# Allegro board Cloudshield_600-0129-001_18Oct18_1015_TAM_review.brd
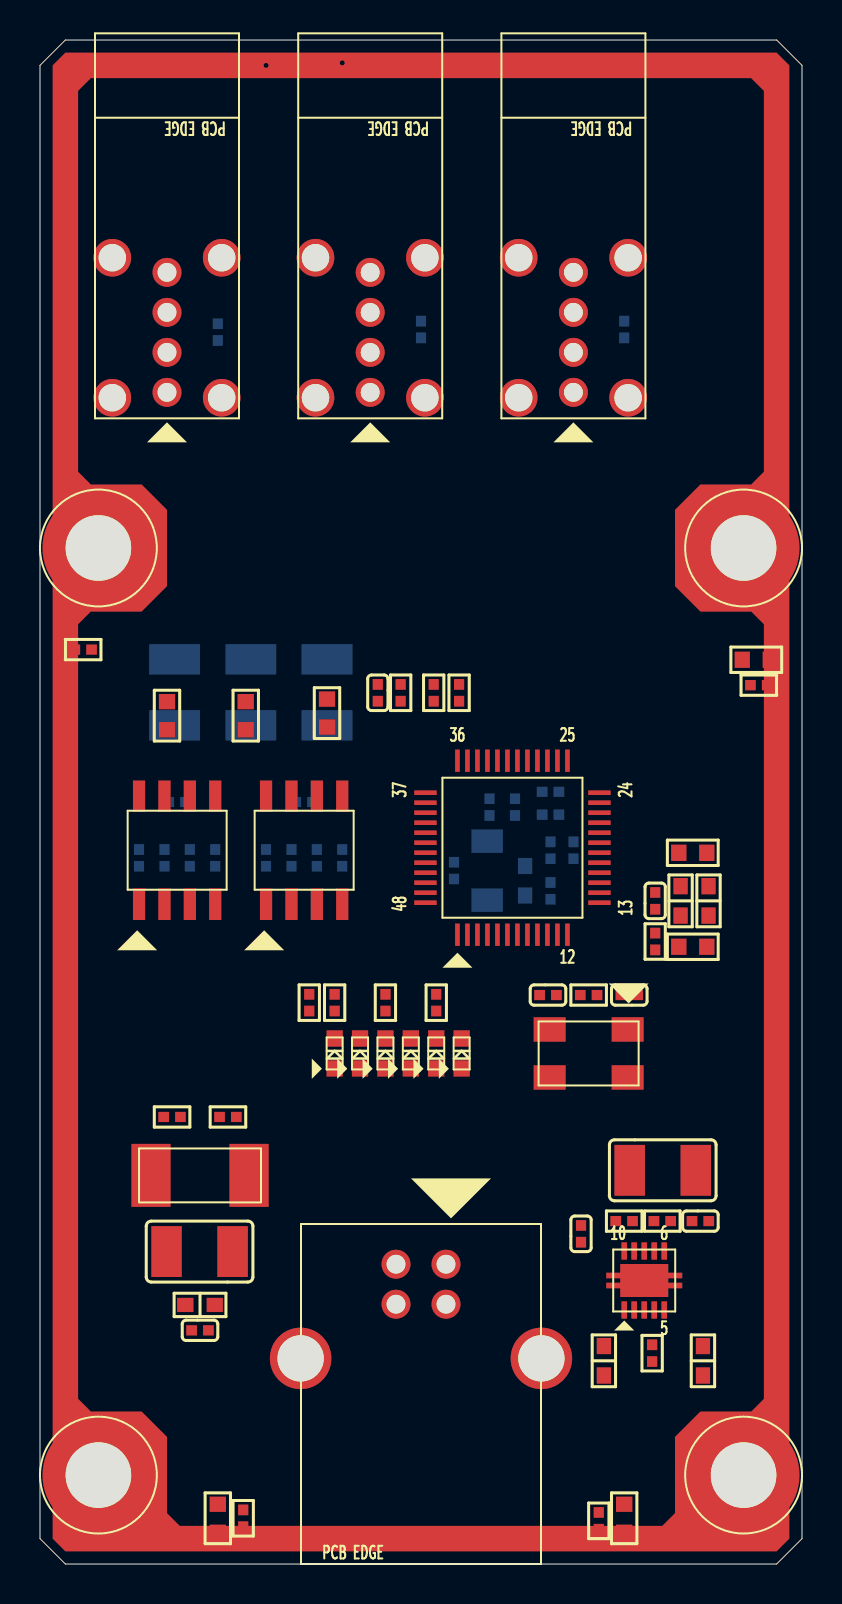
[diagram p0: board, top side]
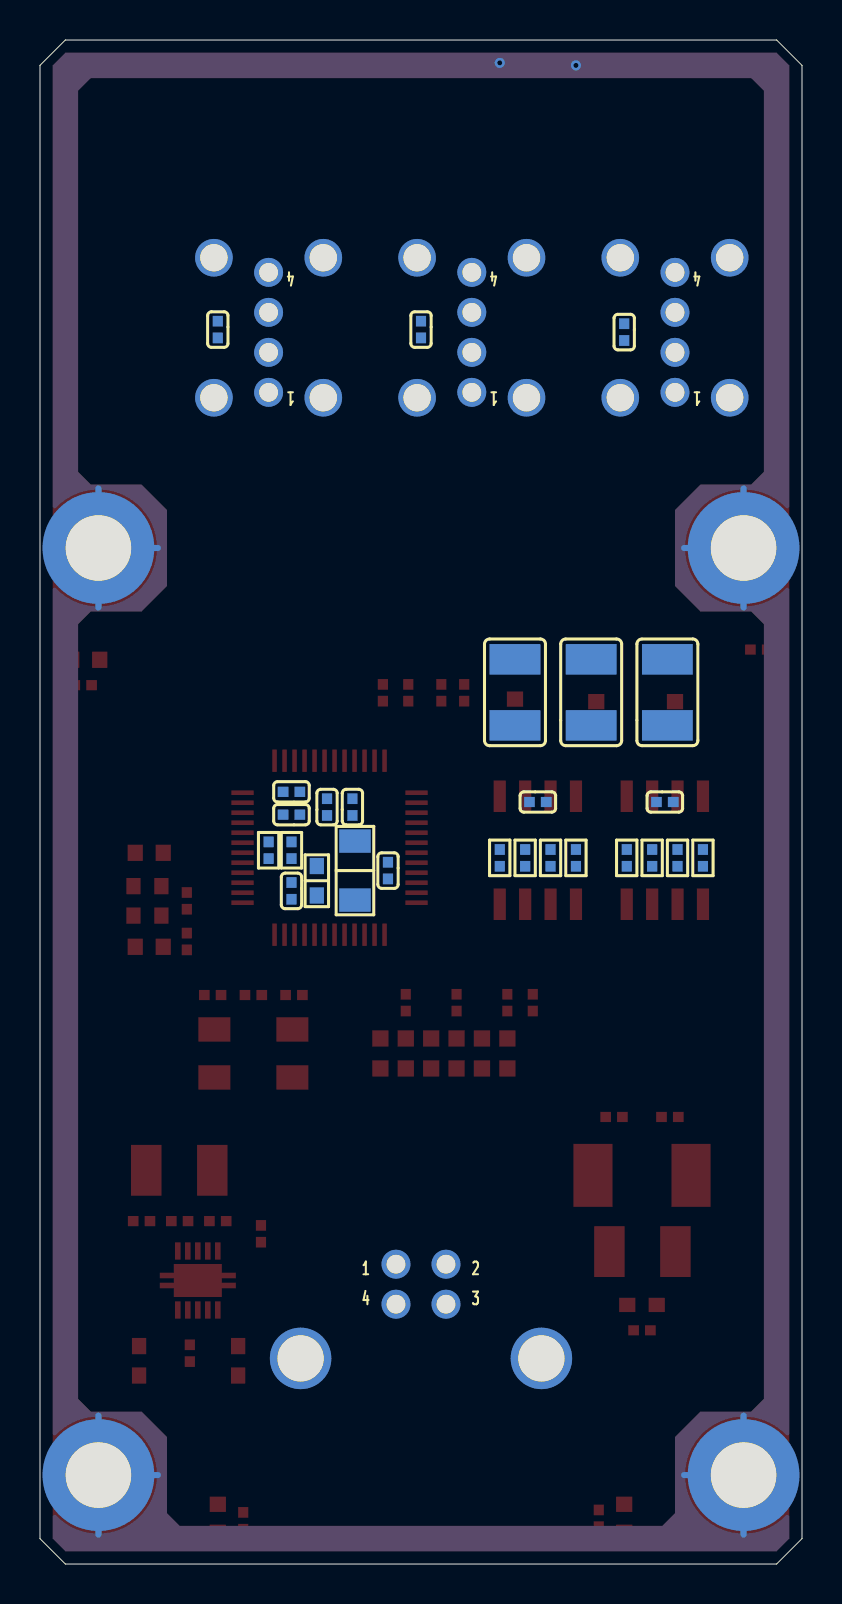
[diagram p1: board, bottom side, seen from below]

Outline 38.1 x 76.2 mm; copper layers: TOP, L2_GND, L3_PWR, BOTTOM. Coordinates in mm from the lower left corner of the outline.
Outline path: 0,74.93 0,1.27 1.27,0 36.83,0 38.1,1.27 38.1,74.93 36.83,76.2 1.27,76.2 0,74.93

## Design rules (mm)
net group USB_D1: nets USB_D1_N USB_D1_P
net group USB_D2: nets USB_D2_N USB_D2_P
net group USB_D3: nets USB_D3_N USB_D3_P
net group USB_D4: nets USB_D4_N USB_D4_P
net group USB_UP: nets USB_UP_N USB_UP_P
net group CLS_GND: nets GND
net group CLS_PWR: nets CHASSIS_GND LDO_FB VBUS_5V0 VBUS_MON VDD_3V3 VDDOUT_2V5 VFIL1_5V0 VFIL2_5V0 VFIL3_5V0 VPORT1_5V0 VPORT2_5V0 VPORT3_5V0 VPORT_5V0
net group CLS_SENSI: nets AVDD_2V5 AVSS_GND XTAL1 XTAL2 XTAL2_R

## Placement (name value [footprint] x y rotation side)
C1  12pF  [0402C]  25.4 28.45 0 top
C2  10uF  [0603C]  8 12.95 0 top
C3  1uF  [0402C]  8 11.68 0 top
C4  12pF  [0402C]  29.46 28.45 180 top
C5  1uF  [0402C]  29.21 61.72 270 bottom
C6  1uF  [0402C]  19.05 61.72 270 bottom
C7  10uF  [0603C]  24.26 34.16 270 bottom
C8  1uF  [0402C]  25.53 37.47 0 bottom
C9  1uF  [0402C]  23.75 37.85 90 bottom
C10  1uF  [0402C]  20.7 34.67 270 bottom
C11  1uF  [0402C]  8.89 61.59 270 bottom
C13  22uF  [1206C]  22.35 34.67 270 bottom
C14  4.7uF  [0603C]  33.43 33.16 90 top
C15  4.7uF  [0603C]  32.03 33.16 90 top
C16  1uF  [0402C]  30.76 33.16 90 top
C17  1uF  [0402C]  16.89 43.56 270 top
C18  1uF  [0402C]  13.21 38.1 180 bottom
C19  100uF  [1210C]  10.54 43.58 90 bottom
C20  100uF  [1210C]  14.35 43.58 90 bottom
C21  0.1uF  [0402C]  25.53 33.66 270 bottom
C22  0.1uF  [0402C]  25.53 38.61 0 bottom
C23  0.1uF  [0402C]  22.48 37.85 90 bottom
C24  1uF  [0402C]  6.86 38.1 180 bottom
C26  100uF  [1210C]  6.73 43.58 90 bottom
C27  100uF  [1210C]  7.98 15.62 180 top
C28  1uF  [0402C]  27.05 16.51 90 top
C29  100uF  [1210C]  31.14 19.68 0 top
C30  10uF  [0603C]  28.19 10.16 90 top
C31  10uF  [0603C]  33.15 10.16 90 top
C32  DNL_1n0F  [0402C]  33.02 17.14 0 top
CN1  USB_B_RECP  [MOLEX_670688011]  19.05 10.28 0 top
CN2  USB_A_VERT_RECP  [MOLEX_672983091]  26.67 58.58 180 top
CN3  USB_A_VERT_RECP  [MOLEX_672983091]  16.51 58.58 180 top
CN4  USB_A_VERT_RECP  [MOLEX_672983091]  6.35 58.58 180 top
D1  LED_GRN_0603  [SMTLED_0603]  21.08 25.53 90 top
D2  LED_GRN_0603  [SMTLED_0603]  19.81 25.53 90 top
D3  LED_GRN_0603  [SMTLED_0603]  18.54 25.53 90 top
D4  LED_GRN_0603  [SMTLED_0603]  17.27 25.53 90 top
D5  LED_GRN_0603  [SMTLED_0603]  16 25.53 90 top
D6  LED_GRN_0603  [SMTLED_0603]  14.73 25.53 90 top
F1  2A_125V  [FUSE_SMD]  8 19.43 180 top
FB1  60OHM_100MHZ_1A  [0603L]  32.64 35.56 180 top
FB2  60OHM_100MHZ_1A  [0603L]  32.64 30.86 180 top
FB4  60OHM_100MHZ_1A  [0603L]  14.35 42.55 90 top
FB5  60OHM_100MHZ_1A  [0603L]  29.21 2.29 90 top
FB6  60OHM_100MHZ_1A  [0603L]  10.29 42.42 90 top
FB7  60OHM_100MHZ_1A  [0603L]  8.89 2.29 90 top
FB8  60OHM_100MHZ_1A  [0603L]  35.81 45.21 180 top
FB9  60OHM_100MHZ_1A  [0603L]  6.35 42.42 90 top
MH1  DNL  [MH_129X220_PTH]  2.92 4.45 0 top
MH2  DNL  [MH_129X220_PTH]  35.18 4.45 0 top
MH3  DNL  [MH_129X220_PTH]  35.18 50.8 0 top
MH4  DNL  [MH_129X220_PTH]  2.92 50.8 0 top
R1  33.2  [0402R]  27.43 28.45 180 top
R2  10K  [0402R]  9.4 22.35 0 top
R3  15K  [0402R]  6.6 22.35 0 top
R4  0  [0402R]  26.67 35.69 90 bottom
R5  DNL_0  [0402R]  25.53 35.69 270 bottom
R6  10K  [0402R]  13.46 28.07 270 top
R7  470  [0402R]  19.81 28.07 90 top
R8  470  [0402R]  17.27 28.07 90 top
R9  470  [0402R]  14.73 28.07 90 top
R11  2.43K  [0402R]  30.76 31.13 90 top
R12  10K  [0402R]  18.03 43.56 90 top
R13  510K  [0402R]  15.11 35.31 90 bottom
R14  510K  [0402R]  11.3 35.31 90 bottom
R15  10K  [0402R]  13.84 35.31 90 bottom
R16  10K  [0402R]  12.57 35.31 90 bottom
R17  510K  [0402R]  8.76 35.31 90 bottom
R18  510K  [0402R]  4.95 35.31 90 bottom
R19  10K  [0402R]  7.49 35.31 90 bottom
R20  10K  [0402R]  6.22 35.31 90 bottom
R21  3.57K  [0402R]  29.21 17.14 180 top
R22  1.15K  [0402R]  31.11 17.14 180 top
R23  10K  [0402R]  30.61 10.54 270 top
R24  0  [0402R]  19.68 43.56 270 top
R25  0  [0402R]  20.95 43.56 270 top
R26  0  [0402R]  10.16 2.29 270 top
R27  0  [0402R]  27.94 2.16 270 top
R28  0  [0402R]  35.94 43.94 0 top
R29  0  [0402R]  2.16 45.72 180 top
U1  UPD720114_QFP  [NEC_TQFP_48]  23.62 35.81 0 top
U2  AP1212  [DIODES_SOP_8L]  13.21 35.69 0 top
U3  AP1212  [DIODES_SOP_8L]  6.86 35.69 0 top
U4  TPS74801  [TI_SON_10]  30.21 14.17 0 top
X1  30MHZ_50PPM  [XTAL_VXM5]  27.43 25.53 180 top

## Library data of the parts
C1 C4 = C_12PF_0402_50V_5P_1500-1206
C2 C7 C30 C31 = C_10UF_0603_6V3_20P_1500-1141
C3 C5 C6 C8-C11 C16-C18 C24 C28 = C_1UF_0402_6V3_10P_1500-1146
C13 = C_22UF_1206_6V3_10P_1500-1097
C14 C15 = C_4U7F_0603_6V3_15P_1500-1207
C19 C20 C26 C27 C29 = C_100UF_1210_6V3_20P_1500-1194
C21-C23 = C_0U1F_0402_16V_10P_1500-1135
C32 = C_0402_16V_20P_X7R_1n0F
CN1 = 3000-1393_USB_B_RECP
CN2-CN4 = 3000-1394_USB_A_VERT_RECP
D1-D6 = LED_0603_GRN_3100-1045
F1 = FUSE_2A_125V_NANO_2300-1027
FB1 FB2 FB4-FB9 = FB_0603_60OHM_1A_2100-1019
MH1-MH4 = MH_129x220_PTH
R1 = R_33R2_0402_1P_1000-1380
R2 R6 R12 R15 R16 R19 R20 R23 = R_10K_0402_1P_1000-1234
R3 = R_15K_0402_5P_1000-1505
R4 R5 R24-R29 = R_0_0402_5P_1000-1377
R7-R9 = R_470_0402_5P_1000-1506
R11 = R_2K43_0402_1P_1000-1503
R13 R14 R17 R18 = R_510K_0402_5P_1000-1504
R21 = R_3K57_0402_1P_1000-1344
R22 = R_1K15_0402_1P_1000-1345
U1 = 4000-1384_UPD720114_TQFP48
U2 U3 = 4000-1385_AP1212L_SOL8L
U4 = IC_TPS74801_SON10_3X3_ADJ_REG
X1 = XTAL_30MHZ_4P_VXM5_1900-1069

## Footprints (pads in the part's own frame, mm; a bottom-side part is the same pattern mirrored in y, then rotated)
0402C
  rect 0.533x0.508 smd: 1(0.419,0) 2(-0.419,0)
0402R
  rect 0.533x0.508 smd: 1(0.419,0) 2(-0.419,0)
0603C
  rect 0.813x0.711 smd: 1(0.737,0) 2(-0.737,0)
0603L
  rect 0.762x0.813 smd: 1(-0.7,0) 2(0.7,0)
1206C
  rect 1.168x1.575 smd: 1(1.473,0) 2(-1.473,0)
1210C
  rect 1.524x2.54 smd: 1(-1.651,0) 2(1.651,0)
DIODES_SOP_8L
  rect 0.61x1.575 smd: 1(-1.905,-2.7) 2(-0.635,-2.7) 3(0.635,-2.7) 4(1.905,-2.7) 5(1.905,2.7) 6(0.635,2.7) 7(-0.635,2.7) 8(-1.905,2.7)
FUSE_SMD
  rect 1.956x3.15 smd: 1(-2.451,0) 2(2.451,0)
MH_129X220_PTH
  round 5.588 hole 3.277: 1(0,0)
MOLEX_670688011
  round 1.448 hole 0.94: 1(1.25,4.71) 2(-1.25,4.71) 3(-1.25,2.71) 4(1.25,2.71)
  round 3.073 hole 2.311: 5(-6.02,0) 6(6.02,0)
MOLEX_672983091
  round 1.448 hole 0.94: 1(0,0) 2(0,-2) 3(0,-4) 4(0,-6)
  round 1.88 hole 1.372: 5(-2.735,0.27) 6(-2.735,-6.73) 7(2.735,-6.73) 8(2.735,0.27)
NEC_TQFP_48
  rect 0.229x1.118 smd: 1(-2.75,-4.35) 2(-2.25,-4.35) 3(-1.75,-4.35) 4(-1.25,-4.35) 5(-0.75,-4.35) 6(-0.25,-4.35) 7(0.25,-4.35) 8(0.75,-4.35) 9(1.25,-4.35) 10(1.75,-4.35) 11(2.25,-4.35) 12(2.75,-4.35) 25(2.75,4.35) 26(2.25,4.35) 27(1.75,4.35) 28(1.25,4.35) 29(0.75,4.35) 30(0.25,4.35) 31(-0.25,4.35) 32(-0.75,4.35) 33(-1.25,4.35) 34(-1.75,4.35) 35(-2.25,4.35) 36(-2.75,4.35)
  rect 1.118x0.229 smd: 13(4.35,-2.75) 14(4.35,-2.25) 15(4.35,-1.75) 16(4.35,-1.25) 17(4.35,-0.75) 18(4.35,-0.25) 19(4.35,0.25) 20(4.35,0.75) 21(4.35,1.25) 22(4.35,1.75) 23(4.35,2.25) 24(4.35,2.75) 37(-4.35,2.75) 38(-4.35,2.25) 39(-4.35,1.75) 40(-4.35,1.25) 41(-4.35,0.75) 42(-4.35,0.25) 43(-4.35,-0.25) 44(-4.35,-0.75) 45(-4.35,-1.25) 46(-4.35,-1.75) 47(-4.35,-2.25) 48(-4.35,-2.75)
SMTLED_0603
  rect 0.813x0.813 smd: 1(-0.749,0) 2(0.749,0)
TI_SON_10
  rect 0.279x0.864 smd: 1(-1,-1.475) 2(-0.5,-1.475) 3(0,-1.475) 4(0.5,-1.475) 5(1,-1.475) 6(1,1.475) 7(0.5,1.475) 8(0,1.475) 9(-0.5,1.475) 10(-1,1.475)
  custom 3.8x1.65 smd: 11(0,0)
XTAL_VXM5
  rect 1.6x1.219 smd: 1(-1.95,-1.2) 2(1.95,-1.2) 3(1.95,1.2) 4(-1.95,1.2)

## Nets
AVDD_2V5: C15.1 C16.1 FB1.2 U1.17(AVDD#17) U1.19(AVDD#19)
AVSS_GND: C15.2 C16.2 FB2.2 R11.1 U1.16(AVSS(R)) U1.18(AVSS)
GND: C1.2 C2.2 C3.2 C4.2 C5.2 C6.2 C7.2 C8.2 C9.2 C10.2 C11.2 C13.2 C14.2 C17.2 C18.2 C19.2 C20.2 C21.2 C22.2 C23.2 C24.2 C26.2 C27.2 C28.2 C29.2 C30.2 C31.2 C32.2 CN1.4(GND) CN1.5(FG1) CN1.6(FG2) CN2.4(GND) CN3.4(GND) CN4.4(GND) FB2.1 FB5.2 FB7.2 FB8.2 R3.2 R5.2 R6.2 R22.2 R24.2 R25.2 R26.2 R27.2 R28.2 R29.2 U1.2(VSSREG) U1.14(TEST) U1.23(VSS#23) U1.27(VSS#27) U1.36(VSS#36) U1.42(VSS#42) U2.6(GND) U3.6(GND) U4.6(GND) U4.11(PAD)
VBUS_5V0: C2.1 C3.1 C27.1 C30.1 C31.1 CN1.1(VBUS) F1.1 R2.1 R23.1 U4.1(VIN1) U4.2(VIN2) U4.4(BIAS) U4.5(EN)
VBUS_MON: R2.2 R3.1 U1.47(VBUSM)
VDD_3V3: C7.1 C8.1 C9.1 C10.1 C28.1 C29.1 R4.1 R12.1 R13.1 R14.1 R15.1 R16.1 R17.1 R18.1 R19.1 R20.1 R21.1 U1.9(VDD33#9) U1.20(VDD33#20) U1.30(VDD33#30) U1.48(VDD33REG) U4.9(VOUT2) U4.10(VOUT1)
VDDOUT_2V5: C13.1 C14.1 C21.1 C22.1 C23.1 FB1.1 U1.1(VDD25OUT) U1.12(VDD25#12) U1.24(VDD25#24) U1.33(VDD25#33)
BUS_B: R4.2 R5.1 U1.13(BUS_B)
CHASSIS_GND: CN2.5(FG1) CN2.6(FG2) CN2.7(FG3) CN2.8(FG4) CN3.5(FG1) CN3.6(FG2) CN3.7(FG3) CN3.8(FG4) CN4.5(FG1) CN4.6(FG2) CN4.7(FG3) CN4.8(FG4) FB5.1 FB7.1 FB8.1 MH1.1 MH2.1 MH3.1 MH4.1 R26.1 R27.1 R28.1 R29.1
LDO_FB: R21.2 R22.1 U4.8(FB)
LDO_PG: R23.2 U4.3(PGD)
LDO_SS: C32.1 U4.7(SS)
LED1: R7.1 U1.6(LED1)
LED1_R: D1.2(CATHODE) D2.2(CATHODE) R7.2
LED2: R8.1 U1.5(LED2)
LED2_R: D3.2(CATHODE) D4.2(CATHODE) R8.2
LED3: R9.1 U1.4(LED3)
LED3_R: D5.2(CATHODE) D6.2(CATHODE) R9.2
LED_AMBER: D2.1(ANODE) D4.1(ANODE) D6.1(ANODE) R6.1 U1.8(AMBER)
LED_GREEN: D1.1(ANODE) D3.1(ANODE) D5.1(ANODE) U1.7(GREEN)
RREF: R11.2 U1.15(RREF)
SYSRST_L: C17.1 R12.2 U1.37(SYSRSTB)
USB1_CS_L: R15.2 U1.46(CSB1) U2.3(FLG2)
USB1_EN_L: R13.2 U1.45(PPB1) U2.4(EN2_L)
USB2_CS_L: R16.2 U1.44(CSB2) U2.2(FLG1)
USB2_EN_L: R14.2 U1.43(PPB2) U2.1(EN1_L)
USB3_CS_L: R19.2 U1.41(CSB3) U3.3(FLG2)
USB3_EN_L: R17.2 U1.40(PPB3) U3.4(EN2_L)
USB4_CS_L: R20.2 U1.39(CSB4) U3.2(FLG1)
USB4_EN_L: R18.2 U1.38(PPB4) U3.1(EN1_L)
USB_D1_N: CN2.2(D_N) U1.25(DM1)
USB_D1_P: CN2.3(D_P) U1.26(DP1)
USB_D2_N: CN3.2(D_N) U1.28(DM2)
USB_D2_P: CN3.3(D_P) U1.29(DP2)
USB_D3_N: CN4.2(D_N) U1.31(DM3)
USB_D3_P: CN4.3(D_P) U1.32(DP3)
USB_D4_N: R25.1 U1.34(DM4)
USB_D4_P: R24.1 U1.35(DP4)
USB_UP_N: CN1.2(D_N) U1.21(DMU)
USB_UP_P: CN1.3(D_P) U1.22(DPU)
VFIL1_5V0: C5.1 CN2.1(VBUS) FB4.2
VFIL2_5V0: C6.1 CN3.1(VBUS) FB6.2
VFIL3_5V0: C11.1 CN4.1(VBUS) FB9.2
VPORT1_5V0: C20.1 FB4.1 U2.5(OUT2)
VPORT2_5V0: C19.1 FB6.1 U2.8(OUT1)
VPORT3_5V0: C26.1 FB9.1 U3.5(OUT2)
VPORT_5V0: C18.1 C24.1 F1.2 U2.7(IN) U3.7(IN)
XTAL1: C1.1 U1.10(X1) X1.3(X2)
XTAL2: R1.1 U1.11(X2)
XTAL2_R: C4.1 R1.2 X1.1(X1)

Pads without a net: U1 3; U3 8; X1 2 4

## Via types
v1: diameter 0.508, hole 0.254, TOP to BOTTOM, 2 vias

## Routing (per net, layer and track width the routed paths; a pad name or vN(x,y) marks a point on that pad's centre or on a via; arc(x,y) is an arc through that point)
CHASSIS_GND: length 35.7
  BOTTOM w0.305: 2.92,1.47 MH1.1 ; MH1.1 5.89,4.45 ; MH1.1 2.92,7.42 ; 32.21,4.45 MH2.1 ; MH2.1 35.18,1.47 ; MH2.1 35.18,7.42 ; MH4.1 2.92,53.77 ; MH4.1 2.92,47.83 ; MH4.1 5.89,50.8 ; MH3.1 35.18,53.77 ; MH3.1 35.18,47.83 ; MH3.1 32.21,50.8
  vias: v1(11.3,74.93) v1(15.11,75.06)

## Copper pours and planes (outline as drawn; the poured copper is in the pictures)
CHASSIS_GND on TOP (solid shape): 37.47,74.93 37.47,1.27 36.83,0.64 1.27,0.64 0.64,1.27 0.64,73.66 1.91,73.66 1.91,54.61 2.54,53.98 5.08,53.98 6.35,52.7 6.35,48.9 5.08,47.62 2.54,47.62 1.91,46.99 1.91,8.26 2.54,7.62 5.08,7.62 6.35,6.35 6.35,2.54 6.99,1.91 31.11,1.91 31.75,2.54 31.75,6.35 33.02,7.62 35.56,7.62 36.2,8.26 36.2,46.99 35.56,47.62 33.02,47.62 31.75,48.9 31.75,52.7 33.02,53.98 35.56,53.98 36.2,54.61 36.2,73.66 35.56,74.3 2.54,74.3 1.91,73.66 0.64,73.66 0.64,74.93 1.27,75.56 36.83,75.56
CHASSIS_GND on BOTTOM: 0.64,74.93 1.27,75.56 36.83,75.56 37.47,74.93 37.47,1.27 36.83,0.64 1.27,0.64 0.64,1.27 ; 1 cut-out
